# Altium PCB CH32X035G8U-R0-1v2.PcbDoc
Units mil, origin at the board's own origin, x right, y up, seen from the top; angles counter-clockwise.
Board outline 1889.76 x 1771.65 mil, 2 copper layers (Top Layer, Bottom Layer); 29 components, 41 nets, 148 pads, 339 vias.
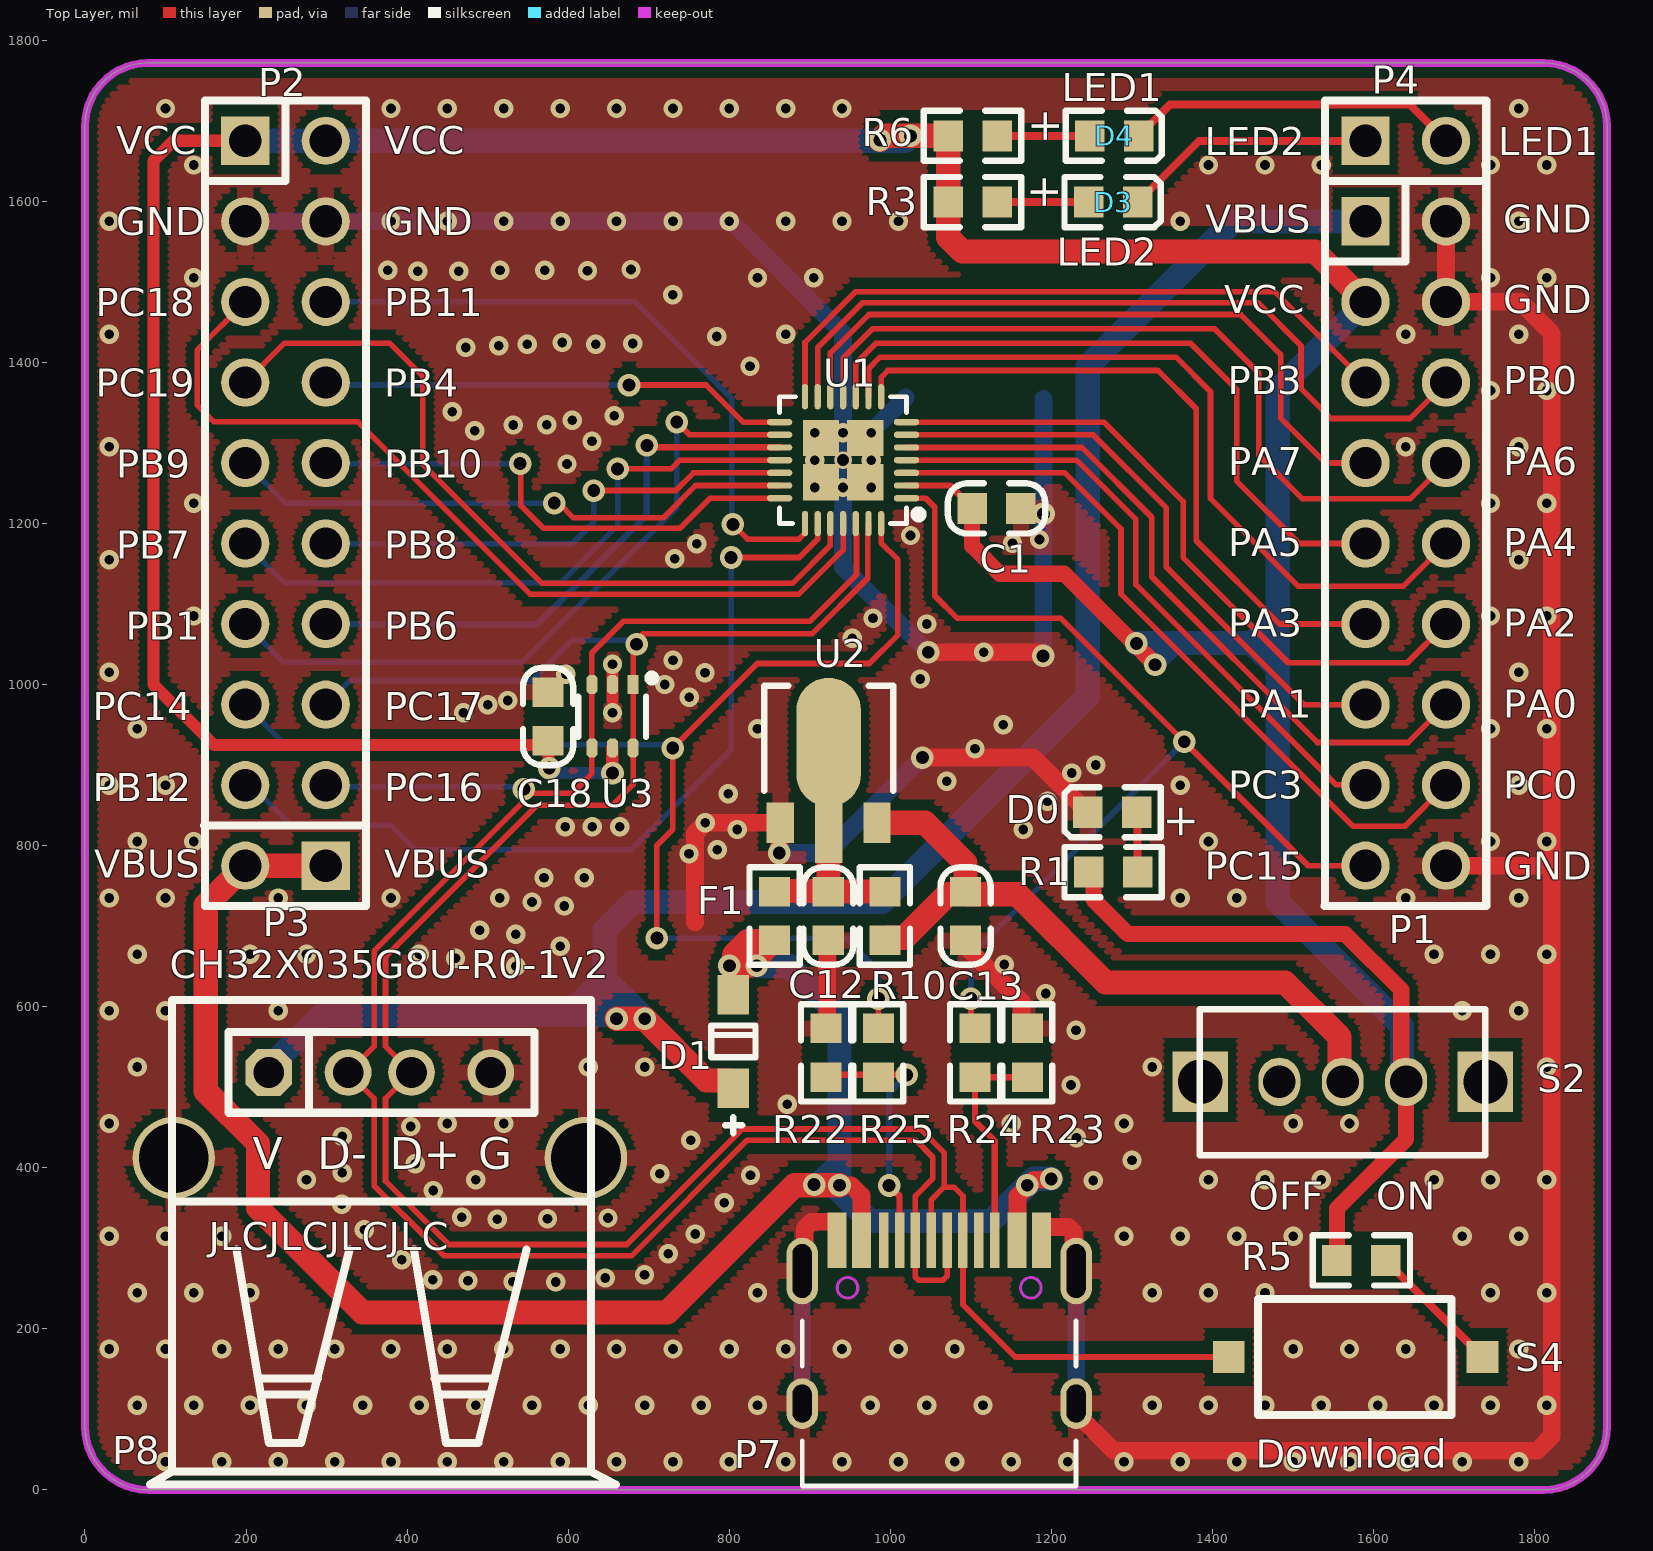
[diagram p0: Top Layer view]
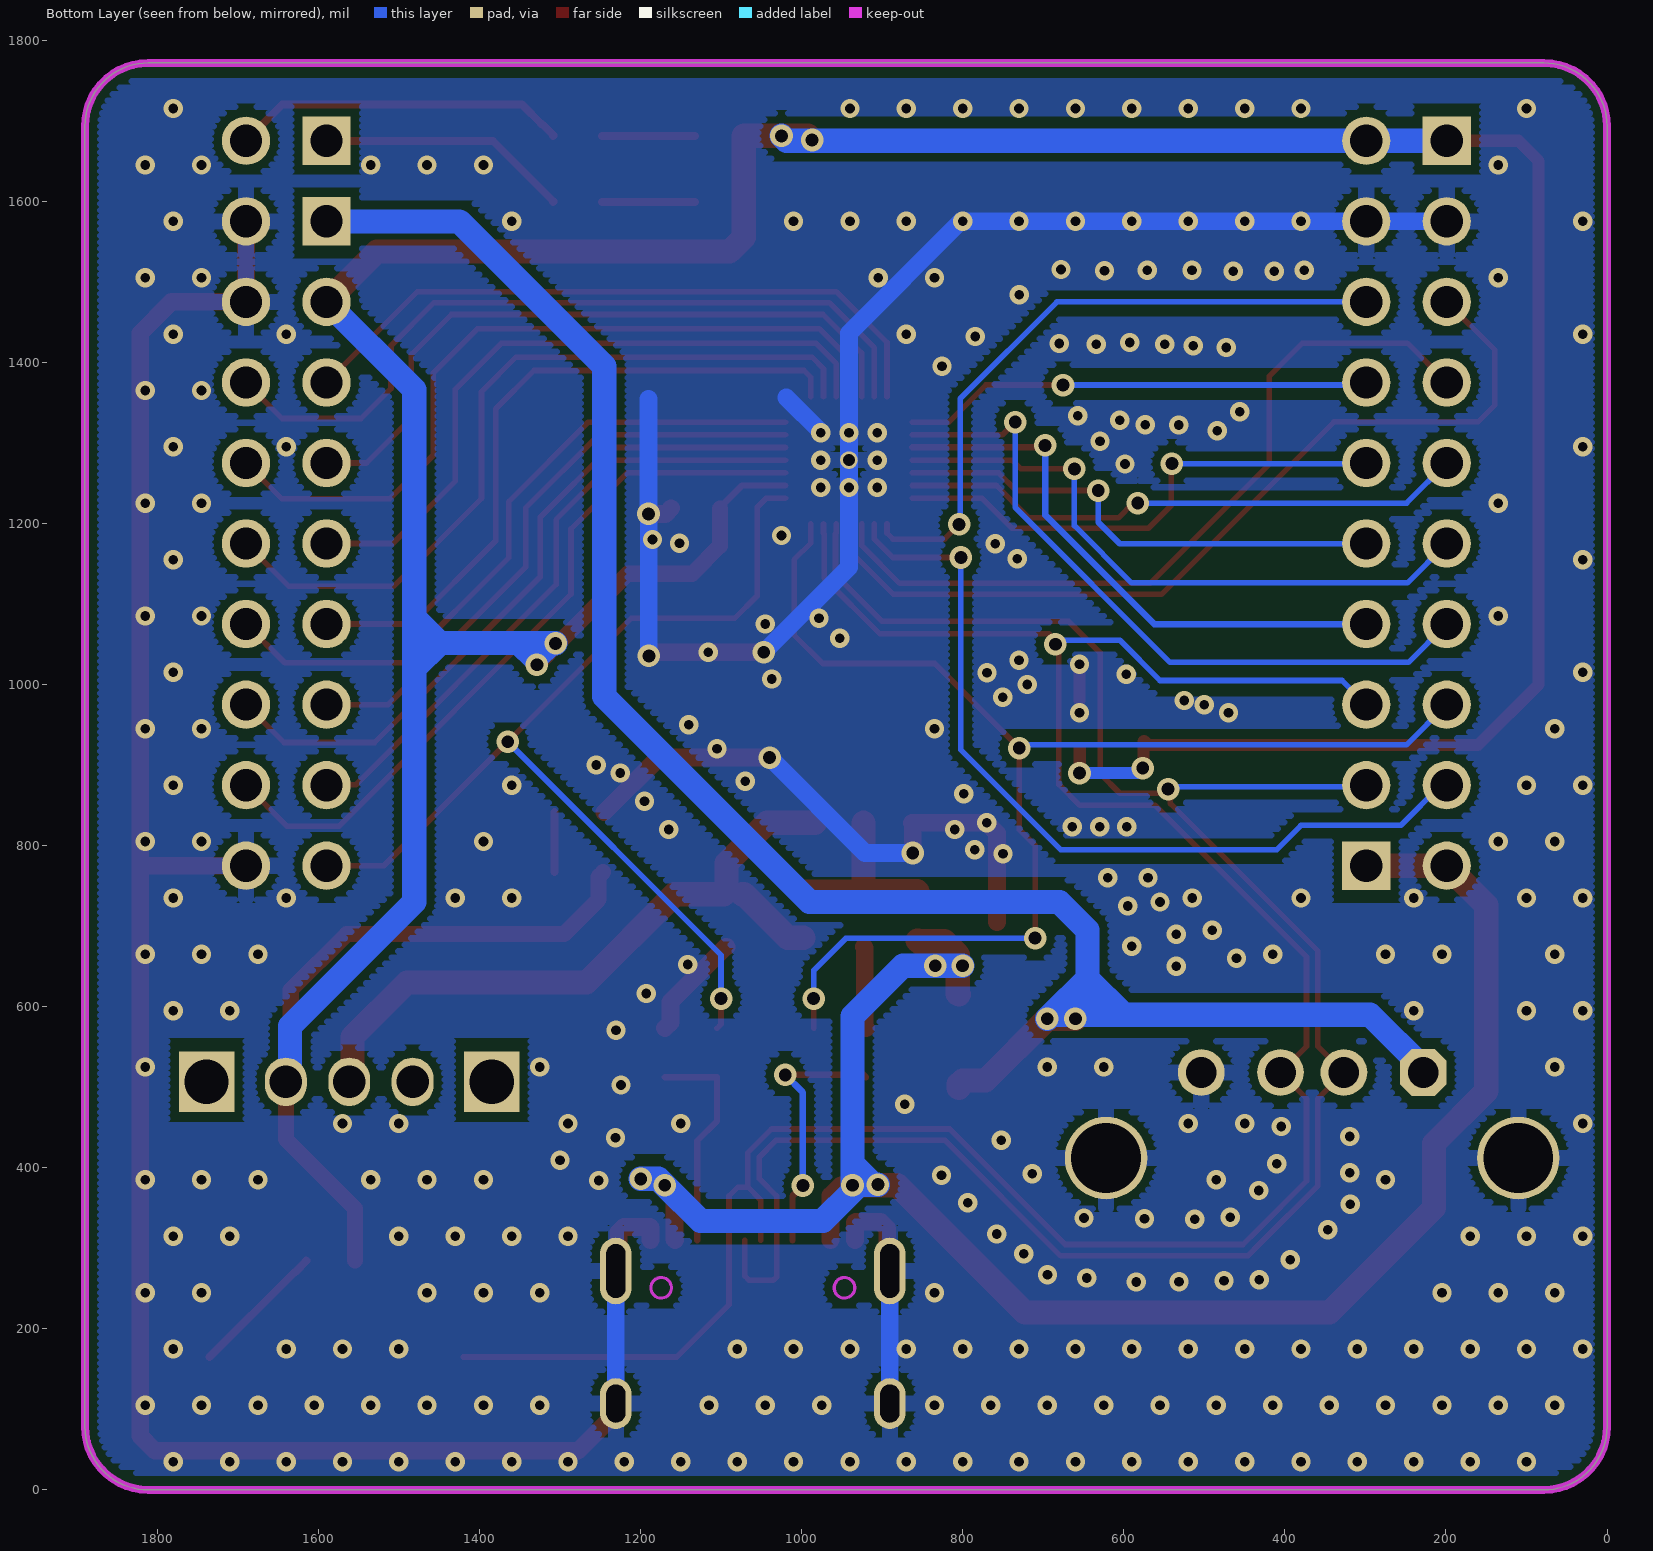
[diagram p1: Bottom Layer view, seen from below]

## Layer stack, top to bottom
Top Solder: solder mask 0.4, Solder Resist, Dk 3.5
Top Layer: signal copper 1.4
Dielectric1: dielectric 12.6, FR-4, Dk 4.8
Bottom Layer: signal copper 1.4
Bottom Solder: solder mask 0.4, Solder Resist, Dk 3.5

## Board outline
0,78.74 0,1692.91 cw(c78.74,1692.91) 78.74,1771.65 1811.02,1771.65 cw(c1811.02,1692.91) 1889.76,1692.91 1889.76,78.74 cw(c1811.02,78.74) 1811.02,0 78.74,0 cw(c78.74,78.74)

## Design rules (kind name [scope] priority, off if disabled: settings)
Clearance Clearance_1 [InPolygon] p1: gap=10 ignorepadtopadclearanceinfootprint=FALSE except(0: Arc-Hole Track-Hole SMDPad-Hole THPad-Hole Via-Hole Fill-Hole Poly-Hole Region-Hole Text-Hole)
Clearance [All] p2: gap=6 ignorepadtopadclearanceinfootprint=FALSE except(0: Arc-Hole Track-Hole SMDPad-Hole THPad-Hole Via-Hole Fill-Hole Poly-Hole Region-Hole Text-Hole)
ComponentClearance [All] p1 off: gap=10 collisioncheckmode=3 verticalgap=10 showdistances=FALSE
DiffPairsRouting [All] p1: maxlimit=10 minlimit=7 mostfreqgap=8 toplayer_minwidth=15 toplayer_maxwidth=15 toplayer_prefwidth=15 bottomlayer_minwidth=15 bottomlayer_maxwidth=15 bottomlayer_prefwidth=15 maxuncoupledlength=500
MinimumSolderMaskSliver [All] p1 off: minsoldermaskwidth=10
PolygonConnect PolygonConnect_1 [IsVia] p1: connectstyle=Direct reliefconductorwidth=10 reliefentries=4 polygonreliefangle="90 Angle" airgapwidth=10
PolygonConnect [All] p2: connectstyle=Relief reliefconductorwidth=20 reliefentries=4 polygonreliefangle="90 Angle" airgapwidth=10
RoutingVias [All] p1: holewidth=16 width=28 viastyle="Through Hole" minholewidth=12 minwidth=24 maxholewidth=28 maxwidth=50
SilkToSilkClearance [All] p1 off: silktosilkclearance=10
SilkToSolderMaskClearance [IsPad] p1 off: minsilkscreentomaskgap=10 clearancetoexposedcopper=TRUE
SolderMaskExpansion [All] p1: expansion=2 istentingtop=FALSE
Width [All] p1: maxlimit=100 minlimit=6 preferedwidth=10
25 further rules are at their usual default settings.

## Components (designator, comment, footprint, x,y, rotation, side; value= is the part's Value field where it differs from the comment)
C1 "0.1uF" 0603_C 1162.03,1218.63 r180 top
C12 "10uF" 0603_C 922.89,742.87 r270 top
C13 "10uF" 0603_C 1093.31,742.87 r270 top
C18 "0.1uF" 0603_C 575,990.63 r270 top
D0 "POWER  red" 0603+ 1305.61,841.34 r180 top
D1 "Diode" SOD-123 805,498.86 r90 top
D3 "LED2" 0603+ 1246.36,1598.95 r0 top
D4 "LED1" 0603+ 1247.7,1681.18 r0 top
F1 "500mA" 0603 856.22,682.24 r90 top
P1 "Header 9X2" IDC18-2.54mm 1589.76,1575 r0 top
P2 "Header 9X2" IDC18-2.54mm 199,1675 r0 top
P3 "HEADER 2" SIP2-2.54mm 299,775 r90 top
P4 "Header 2" SIP2-2.54mm 1589.76,1675 r270 top
P7 "TYPE-C" TYPE-C-Receptacle-2.0 1060.55,310 r0 top
P8 "USB_A" USBAF 228.29,518.31 r0 top
R1 "1K" 0603 1306.99,767.04 r180 top
R3 "1K" 0603 1071.74,1598.95 r0 top
R5 "4.7K" 0603 1554.37,285 r0 top
R6 "1K" 0603 1071.74,1681.18 r0 top
R10 "NC(0Ω)" 0603 993.16,682.24 r90 top value=10K
R22 "5.1K" 0603 920.04,512.42 r90 top
R23 "5.1K" 0603 1170.04,512.42 r90 top
R24 "0Ω" 0603 1105.04,573.05 r270 top
R25 "0Ω" 0603 985.04,512.42 r90 top
S2 "SW" SW1 1561.64,506.67 r0 top
S4 "Download" SMD_6.1x3.65x2.5mm-KEY 1735,165 r180 top
U1 "CH32X035G8U6" QFN28_4X4 941.26,1278.5 r90 top
U2 "HT7533" SOT-89 863.34,828.28 r0 top
U3 "CH412K" SOT-363 680.59,1000 r180 top

## Footprints (in the part's own frame and the unit in brackets; to place one, negate y for a bottom-side part, rotate by r counter-clockwise, add the part's x,y. Pads: shape width x height; smd on the part's side, far side on the other; paste and mask are expansions set on the pad)
0603 [mm]
  rect 0.93x0.98 smd: 1(0,0) 2(1.54,0)
  silkscreen extent -0.76,-0.79 2.3,0.79
0603+ [mm]
  rect 0.93x0.98 smd: 1(0,0) 2(1.54,0)
  silkscreen extent -0.76,-0.79 2.27,0.79
0603_C [mm]
  rect 0.93x0.98 smd mask+0.051: 1(0,0) 2(1.54,0)
  silkscreen extent -0.76,-0.79 2.31,0.79
IDC18-2.54mm [mil]
  rect 60x60 hole 40: 1(0,0)
  round 60 hole 40: 2(100,0) 3(0,-100) 4(100,-100) 5(0,-200) 6(100,-200) 7(0,-300) 8(100,-300) 9(0,-400) 10(100,-400) 11(0,-500) 12(100,-500) 13(0,-600) 14(100,-600) 15(0,-700) 16(100,-700) 17(0,-800) 18(100,-800)
  silkscreen extent -51,-850 150,50
QFN28_4X4 [mm]
  rect 1.143x1.143 smd mask+0: 0(-0.699,-0.699) 0(-0.699,0.698) 0(0.699,-0.699) 0(0.699,0.698)
  round 0.559 hole 0.381 mask+0.051: 0(0,0)
  oval 0.2x0.8 smd mask+0.051: 1(-1.2,-2) 2(-0.8,-2) 3(-0.4,-2) 4(0,-2) 5(0.4,-2) 6(0.8,-2) 7(1.2,-2) 15(1.2,2) 16(0.8,2) 17(0.4,2) 18(0,2) 19(-0.4,2) 20(-0.8,2) 21(-1.2,2)
  oval 0.8x0.2 smd mask+0.051: 8(2,-1.2) 9(2,-0.8) 10(2,-0.4) 11(2,0) 12(2,0.4) 13(2,0.8) 14(2,1.2) 22(-2,1.2) 23(-2,0.8) 24(-2,0.4) 25(-2,0) 26(-2,-0.4) 27(-2,-0.8) 28(-2,-1.2)
  silkscreen extent -2,-2.51 2,2
SIP2-2.54mm [mil]
  rect 60x60 hole 40: 1(0,0)
  round 60 hole 40: 2(0,100)
  silkscreen extent -50,-50 50,150
SMD_6.1x3.65x2.5mm-KEY [mm]
  rect 1x1 smd: 1(0,0) 2(8,0)
  silkscreen extent 0.98,-1.83 7.08,1.83
SOD-123 [mm]
  rect 1.25x1 smd: 1(0,0) 2(2.95,0)
  silkscreen extent -1.43,-0.7 1.97,0.7
SOT-89 [mil]
  rect 34x50 smd: 1(0,0) 3(120,0)
  rect 34x100 smd: 2(60,0)
  oval 80x160 smd: ""(60,100)
  silkscreen extent -20,40 140,170
SOT-363 [mm]
  rect 0.35x0.6 smd mask+0.051: 1(0,0)
  oct 0.35x0.6 smd mask+0.051: 2(0.65,0) 3(1.3,0) 4(1.3,2) 5(0.65,2) 6(0,2)
  silkscreen extent -0.7,-0.31 1.73,1.65
SW1 [mm]
  rect 1.75x1.9 hole 1.4: 0(-4.5,0) 0(4.5,0)
  oval 1.321x1.524 hole 1.016: 1(0,0) 2(-2,0) 3(2,0)
  silkscreen extent -4.51,-2.31 4.5,2.29
TYPE-C-Receptacle-2.0 [mm]
  oval 1x1.6 hole 0.6 slot 1.2 at 90 deg: 0(-4.32,-5.15) 0(4.32,-5.15)
  oval 1x2.1 hole 0.6 slot 1.7 at 90 deg: 0(-4.32,-0.97) 0(4.32,-0.97)
  rect 0.6x1.75 smd mask+0.051: A1(-3.225,0) A4(-2.45,0) B1(3.225,0) B4(2.45,0)
  rect 0.3x1.75 smd mask+0.051: A5(-1.25,0) A6(-0.25,0) A7(0.25,0) A8(1.25,0) B5(1.75,0) B6(0.75,0) B7(-0.75,0) B8(-1.75,0)
  Keep-Out Layer circle w0.1: c2.89,-1.5 r0.325
  Keep-Out Layer circle w0.1: c-2.89,-1.5 r0.325
  silkscreen extent -4.32,-7.75 4.32,-2.55
USBAF [mm]
  round 2.6 hole 2.2: 0(-3,-2.7) 0(10,-2.7)
  oct 1.473x1.473 hole 0.965: 1(0,0)
  round 1.473 hole 0.965: 2(2.5,0) 3(4.5,0) 4(7,0)
  silkscreen extent -3.75,-12.99 10.95,2.29

## Part data
C1 C18: library part Cap, "Capacitor"
C12 C13: library part CAP, "Capacitor"
D0 D3 D4: library part LED0, "Typical INFRARED GaAs LED", LatestRevisionDate=08-Jul-2005, LatestRevisionNote="Mech Layer 1 removed.", PackageReference=LED-0, Published=8-Jun-2000, Publisher="Altium Limited"
D1: "Default Diode", Code_JEDEC=DO-214-AB, LatestRevisionDate=17-Jul-2002, LatestRevisionNote="Re-released for DXP Platform.", PackageReference=SMC, PackageVersion=Sep-1996, Published=8-Jun-2000, Publisher="Altium Limited"
F1: library part FUSE1, "Fuse"
P1 P2: "Header, 9-Pin, Dual row", LatestRevisionDate=17-Jul-2002, LatestRevisionNote="Re-released for DXP Platform.", Publisher="Altium Limited"
P3: "Header, 2-Pin"
P4: library part "HEADER 2", "Header, 2-Pin"
P7: library part TYPE-C1
P8: library part USB, "USB Port"
R1 R3 R6: library part "Res Semi", "Semiconductor Resistor", LatestRevisionDate=17-Jul-2002, LatestRevisionNote="Re-released for DXP Platform.", PackageReference=AXIAL-0.5, Published=8-Jun-2000, Publisher="Altium Limited"
R5 R10 R22 R23 R24 R25: library part Res2, "Resistor"
  R10: LatestRevisionDate=17-Jul-2002, LatestRevisionNote="Re-released for DXP Platform.", PackageReference=AXIAL-0.4, Published=8-Jun-2000, Publisher="Altium Limited"
S4: library part KEY1
U1: "RISC-V MCU with USB/PD/ADC/SPI/I2C/UART/OA/CMP"
U2: library part 1117-3.3V
U3: "Qaud ESD protect, high speed"

## Via types
v1: diameter 24, hole 12, Top Layer to Bottom Layer, tented both sides, 302 vias
v2: diameter 28, hole 16, Top Layer to Bottom Layer, tented both sides, 37 vias

## Nets (pads, with @x,y where several pads share a name; then routed paths per layer and width w, separated by ;. In a path a pad name is that pad's centre, name@x,y a point inside that pad or via, vN(x,y) a via of type N, cw(c..) or ccw(c..) an arc to the next point about the centre after c; other vN are vias at no path point)
5V: C12.1 F1.2 R10.2 U2. U2.2 | length 223.3
  Top Layer w30: F1.2 856.88,743.54 922.22,743.54 C12.1 ; U2.2 923.11,828.05 C12.1@923.11,743.1 ; R10.2 992.94,743.1 C12.1@923.11,743.1 ; C12.1 C12.1@923.11,743.1 ; C12.1 C12.1@923.11,743.1
CC1: P2.15 R25.2 U1.28 | length 1645.4
  Top Layer w7: v2(710,685) 710,800 729.76,819.76 v2(729.76,921.03) 834.74,1026.01 973.8,1026.01 1009.29,1061.51 1009.29,1155.05 988.5,1175.84 U1.28 ; v2(985,610) 985,573.09 R25.2
  Bottom Layer w7: P2.15 249,925 725.78,925 v2(729.76,921.03) ; v2(710,685) 945,685 985,645 v2(985,610)
CC2: P1.17 R24.1 U1.1 | length 1290.8
  Top Layer w7: U1.1 1043.83,1231.26 1055.13,1219.96 1055.13,1110.09 1083.1,1082.12 1211.64,1082.12 1518.76,775 P1.17 ; v2(1100,610) 1100,578.09 R24.1
  Bottom Layer w7: v2(1100,610) 1100,664.02 v2(1364.87,928.89)
GND: C1.1 C12.2 C13.2 C18.1 D0.2 P1.2 P1.4 P1.18 P2.3 P2.4 P7.0 P7.A1 P7.B1 P8.0 P8.4 R22.2 R23.2 U1.0 U2.1 U3.2 | length 5731.2
  Top Layer w15: 655,980 U3.2 v1(655,1025)
  Top Layer w22: 757.33,705 757.33,815.39 v1(770.22,828.28) U2.1 861.97,826.9 v2(861.97,790.78) ; P7.0@890.47,271.81 893.8,275.13 893.8,324.53 902.05,332.79 932.77,332.79 933.58,331.98 P7.A1 ; R22.2 921.46,574.47 921.46,672.95 C12.2@922.89,674.37 ; v2(1039.74,909.28) 1177.05,909.28 D0.2 ; v2(1046.95,1039.97) v1(1116.05,1039.97) 1185.16,1039.97 v2(1189.63,1035.5) ; C13.2@1093.31,674.37 1094.3,674.37 1162.69,605.97 1162.69,580.35 R23.2 ; C1.1 1168.91,1211.75 v2(1190.09,1211.75) ; P7.B1 1187.52,325.74 1188.33,326.55 1220.56,326.55 1227.31,319.8 1227.31,275.13 P7.0@1230.63,271.81 ; P7.0@1230.63,107.24 1236.3,101.57 1236.3,89.76 1277.32,48.74 1803.08,48.74 1821.23,66.9 1821.23,774.8 ; P1.18 1689.96,774.8 1821.23,774.8 ; P1.2 P1.4 1782.39,1475 1821.23,1436.15 1821.23,774.8
  Bottom Layer w22: P2.3 P2.4 802.45,1575 941.26,1436.19 v1(941.26,1312.5) 941.26,1278.5 v1(941.26,1244.5) 941.26,1145.66 v2(1046.95,1039.97) ; v2(861.97,790.78) 921.24,790.78 v2(1039.74,909.28) ; P7.0@890.47,107.24 P7.0@890.47,271.81 ; v1@975.76,1313 1019.01,1356.26 ; v2(1189.63,1035.5) 1189.63,1211.29 v2(1190.09,1211.75) 1190.09,1354.52 ; P7.0@1230.63,107.24 P7.0@1230.63,271.81
  other v1: 100,35 170,35 240,35 310,35 380,35 450,35 520,35 590,35 660,35 730,35 800,35 870,35 940,35 1010,35 1080,35 1150,35 1220,35 1290,35 1360,35 1430,35 1500,35 1570,35 1640,35 1710,35 1780,35 65,105 135,105 205,105 275,105 345,105 415,105 485,105 555,105 625,105 695,105 765,105 835,105 975,105 1045,105 1115,105 1325,105 1395,105 1465,105 1535,105 1605,105 1675,105 1745,105 1815,105 30,175 100,175 170,175 240,175 310,175 380,175 450,175 520,175 590,175 660,175 730,175 800,175 870,175 940,175 1010,175 1080,175 1500,175 1570,175 1640,175 1780,175 65,245 135,245 205,245 835,245 1325,245 1395,245 1465,245 1745,245 1815,245 584.51,258.15 531.43,258.6 475.65,259.5 432.02,260.85 646.13,263.1 694.77,267.06 393.23,285.9 724.31,293.16 30,315 100,315 170,315 1290,315 1360,315 1430,315 1500,315 1710,315 1780,315 757.79,317.77 346.58,323.12 511.84,336.02 574.38,336.52 649.31,337.51 467.68,338.5 318.79,354.88 793.73,356.67 432.44,371.75 1251.74,384.23 275,385 485,385 1395,385 1465,385 1535,385 1675,385 1745,385 1815,385 826.22,390.64 713.83,392.6 319.29,393.59 410.11,405 1299.9,409.22 752.04,434.28 1230.98,437.37 319.29,438.75 404.65,451.16 30,455 450,455 520,455 1150,455 1290,455 1500,455 1570,455 871.93,478.76 1224.26,502.72 65,525 625,525 695,525 1325,525 1815,525 1230.36,570.52 30,595 100,595 240,595 1710,595 1780,595 1193.06,616.24 535,650 1141.21,652.36 460,660 65,665 205,665 275,665 415,665 1675,665 1745,665 1815,665 590,675 535,690 490,695 595,725 555,730 30,735 100,735 240,735 380,735 515,735 1360,735 1430,735 1640,735 1780,735 570,760 620,760 750,790 785,795 65,805 135,805 1395,805 1745,805 1815,805 810,820 1165,820 596.17,823.5 630,823.5 663.83,823.5 1195,855 798.76,864.31 30,875 100,875 1360,875 1780,875 1070,880 1225,890 1255,900 1105,920 65,945 835,945 1745,945 1815,945 1140,950 470,965 655,965 500,975 525,980 750.25,984.25 720,1000 1037.07,1006.74 597.08,1012.57 769.74,1014.45 30,1015 1780,1015 730,1030 952.84,1057.39 1045,1075 978.34,1082.33 135,1085 1745,1085 1815,1085 30,1155 1780,1155 732.46,1156.17 759.42,1174.79 1151.61,1175.25 1185.13,1179.9 1025,1185 135,1225 1745,1225 1815,1225 906.26,1244.5 976.26,1244.5 598.58,1273.75 906.26,1278.5 976.26,1278.5 30,1295 1640,1295 1780,1295 629.54,1301.8 906.26,1312.5 976.26,1312.5 483.94,1314.86 531.83,1322.12 573.42,1322.6 604.87,1327.92 657.11,1333.73 455.88,1338.56 1745,1365 1815,1365 825.72,1395.11 472.76,1418.29 513.84,1420.42 549.25,1422.54 634.23,1422.54 680.27,1423.25 592.45,1424.67 784.52,1432.05 30,1435 870,1435 1640,1435 1780,1435 729.82,1483.9 135,1505 835,1505 905,1505 1745,1505 1815,1505 413.01,1513.03 464.16,1513.03 376.08,1514.45 515.3,1514.45 570.71,1514.45 623.98,1513.74 677.97,1515.16 30,1575 380,1575 450,1575 520,1575 590,1575 660,1575 730,1575 800,1575 870,1575 940,1575 1010,1575 1360,1575 1780,1575 135,1645 1395,1645 1465,1645 1535,1645 1745,1645 1815,1645 100,1715 380,1715 450,1715 520,1715 590,1715 660,1715 730,1715 800,1715 870,1715 940,1715 1780,1715
LED1: D4.2 P4.2 | length 416.7
  Top Layer w10: D4.2 1308.33,1682.16 1321.64,1695.47 1322.62,1695.47 1347.15,1719.99 1644.77,1719.99 P4.2
LED2: D3.2 P4.1 | length 313.5
  Top Layer w10: D3.2@1308.33,1598.95 1308.33,1599.93 1383.4,1675 P4.1
NetC13_1: C13.1 R10.1 S2.1 U2.3 | length 860.9
  Top Layer w30: U2.3 1043.04,828.28 1093.31,778 C13.1 1096.62,739.57 1157.6,739.57 1267.17,630 1490,630 1557.78,562.22 1557.78,510.53 S2.1 ; R10.1@997.45,685.55 1017.31,685.55 1071.32,739.57 1073.62,739.57
NetD0_1: D0.1 R1.1 | length 74.3
  Top Layer w10: R1.1 D0.1@1306.99,841.34
NetD3_1: D3.1 R3.2 | length 115.3
  Top Layer w10: R3.2 D3.1@1247.7,1598.95
NetD4_1: D4.1 R6.2 | length 115.3
  Top Layer w10: R6.2 D4.1
NetP7_A5: P7.A5 R22.1 R25.1 | length 321.2
  Top Layer w8: R22.1 922.92,515.3 v2(1020.25,515.3) ; v2(998.33,377.93) 1011.34,364.92 P7.A5
  Bottom Layer w8: v2(998.33,377.93) 998.33,493.37 v2(1020.25,515.3)
NetP7_B5: P7.B5 R23.1 R24.2 | length 277.5
  Top Layer w8: P7.B5 1129.45,433.41 1105.04,457.82 R24.2 R23.1
NetR5_2: R5.2 S4.1 | length 170.3
  Top Layer w10: R5.2 1615,284.02 1628.31,270.71 1629.29,270.71 S4.1
PA0: P1.14 U1.5 | length 884.3
  Top Layer w7: U1.5 1237.79,1294.25 1324.41,1207.63 1324.41,1133.68 1530.11,927.99 1642.75,927.99 P1.14
PA1: P1.13 U1.6 | length 751.5
  Top Layer w7: U1.6 1251.63,1310 1342.65,1218.97 1342.65,1145.61 1513.26,975 P1.13
PA2: P1.12 U1.7 | length 854.4
  Top Layer w7: U1.7 1264.9,1325.75 1363.42,1227.22 1363.42,1157.45 1493.98,1026.89 1641.66,1026.89 P1.12
PA3: P1.11 U1.8 | length 855.2
  Top Layer w7: U1.8 988.5,1381.32 996.94,1389.76 1332.27,1389.76 1379.74,1342.3 1379.74,1178.45 1483.18,1075 P1.11
PA4: P1.10 U1.9 | length 975.3
  Top Layer w7: U1.9 972.75,1392.05 987.13,1406.43 1354.45,1406.43 1397.49,1363.39 1397.49,1230.93 1506.62,1121.8 1636.57,1121.8 P1.10
PA5: P1.9 U1.10 | length 853.9
  Top Layer w7: U1.10 957,1398.58 981.88,1423.45 1372.96,1423.45 1429.89,1366.52 1429.89,1252.77 1507.66,1175 P1.9
PA6: P1.8 U1.11 | length 977.1
  Top Layer w7: U1.11 941.26,1405.1 977.87,1441.71 1402.5,1441.71 1457.39,1386.82 1457.39,1284.54 1511.15,1230.78 1645.54,1230.78 P1.8
PA7: P1.7 U1.12 | length 861
  Top Layer w7: U1.12 925.51,1411.62 973.23,1459.35 1434.77,1459.35 1484.5,1409.62 1484.5,1330.69 1540.2,1275 P1.7
PB0: P1.6 U1.13 | length 973.5
  Top Layer w7: U1.13 909.76,1418.14 965.73,1474.11 1456.25,1474.11 1509.78,1420.59 1509.78,1367.41 1547.04,1330.15 1644.91,1330.15 P1.6
PB1: P2.13 U1.16 | length 875.4
  Top Layer w7: v2(734.82,1325.76) 750.58,1310 U1.16
  Bottom Layer w7: P2.13 246.55,1027.45 542.45,1027.45 734.82,1219.82 v2(734.82,1325.76)
PB3: P1.5 U1.14 | length 836
  Top Layer w7: U1.14 894.01,1424.67 957.03,1487.68 1477.08,1487.68 P1.5
PB4: P2.8 U1.15 | length 586.1
  Top Layer w7: v2(675.49,1371.73) 771.19,1371.73 817.17,1325.75 U1.15
  Bottom Layer w7: P2.8 301.67,1377.67 307.6,1371.73 v2(675.49,1371.73)
PB6: P2.14 U1.17 | length 715
  Top Layer w8: P2.14 P2.14@304.68,1080.68 ; v2(697.65,1296.74) 700.15,1294.25 U1.17
  Bottom Layer w8: P2.14 562.29,1075 697.65,1210.37 v2(697.65,1296.74)
PB7: P2.11 U1.18 | length 788.2
  Top Layer w7: v2(661.42,1267.72) 727.8,1267.72 738.59,1278.5 U1.18
  Bottom Layer w7: P2.11 247.85,1126.15 590.41,1126.15 661.42,1197.16 v2(661.42,1267.72)
PB8: P2.12 U1.19 | length 623.1
  Top Layer w7: v2(631.73,1240.75) 733.45,1240.75 755.46,1262.76 U1.19
  Bottom Layer w7: P2.12 299.33,1174.67 604.94,1174.67 631.73,1201.46 v2(631.73,1240.75)
PB9: P2.9 U1.20 | length 708.3
  Top Layer w7: v2(582.67,1225.1) 588.35,1225.1 606.56,1206.89 717.98,1206.89 758.1,1247.01 U1.20
  Bottom Layer w7: P2.9 248.9,1225.1 v2(582.67,1225.1)
PB10: P2.10 U1.21 | length 642.5
  Top Layer w7: v2(540.31,1274.15) 540.9,1273.56 540.9,1222.45 569.46,1193.89 738.83,1193.89 776.2,1231.26 U1.21
  Bottom Layer w7: P2.10 299.85,1274.15 v2(540.31,1274.15)
PB11: P2.6 U1.22 | length 822.5
  Top Layer w7: v2(804.35,1198.79) 822.63,1180.52 886.57,1180.52 894.01,1187.95 U1.22
  Bottom Layer w7: P2.6 682.91,1475 803.09,1354.82 803.09,1200.05 v2(804.35,1198.79)
PB12: P2.17 U1.23 | length 1062.7
  Top Layer w7: v2(802.26,1157.61) 886.9,1157.61 909.59,1180.31 909.59,1199.6 U1.23
  Bottom Layer w7: P2.17 206.17,875 256.17,825 380,825 410,795 678.44,795 802.26,918.81 v2(802.26,1157.61)
PC0: P1.16 U1.3 | length 919.9
  Top Layer w7: U1.3 1216.58,1262.76 1286.35,1192.99 1286.35,1112.21 1574.55,824.01 1638.78,824.01 P1.16
PC3: P1.15 U1.4 | length 784.1
  Top Layer w7: U1.4 1230.91,1278.5 1304.8,1204.62 1304.8,1123.99 1553.36,875.43 1589.34,875.43 P1.15
PC16: P2.18 P7.A7 P7.B7 P8.2 U1.26 U3.3 U3.4 | length 2564.2
  Top Layer w7: v2(545,870) v2@545,865 ; U1.26 957,1187.72 957.88,1186.84 957.88,1136.26 900.12,1078.5 668.5,1078.5 629.41,1039.41 U3.3 U3.4 629.41,889.41 605,865 v2@545,865 ; P7.A7 1070.39,265.63 1065.08,260.32 1035.12,260.32 1031.02,264.42 P7.B7 1031.02,364.89 1052.65,386.51 1052.65,413.02 1031.57,434.1 821.92,434.1 678.45,290.63 446.12,290.63 429.9,306.84 359.09,377.66 359.09,485.94 P8.2 359.09,550.68 359.09,669.09 542.18,852.18 542.18,862.18 v2@545,865
  Bottom Layer w7: P2.18 300.88,873.12 541.88,873.12 v2(545,870)
PC17: P2.16 P7.A6 P7.B6 P8.3 S4.2 U1.27 U3.1 U3.6 | length 3121.6
  Top Layer w7: U1.27 972.75,1187.72 971.88,1186.84 971.88,1131.88 902.77,1062.77 692.77,1062.77 680.59,1050.59 U3.1 U3.6 680.59,875.59 655,850 561.19,850 373.09,661.89 373.09,550.68 P8.3 373.09,485.94 373.09,383.46 434.85,321.69 451.92,304.63 672.65,304.63 816.13,448.1 1037.37,448.1 1066.65,418.82 1066.65,375.93 ; P7.A6 1050.71,359.99 1066.65,375.93 ; S4.2 1155,165 1090.08,229.92 P7.B6 1090.08,364.89 1079.03,375.93 1066.65,375.93
  Bottom Layer w7: P2.16 329,1005 555,1005 605,1055 v2@685,1055
  other v2: 685,1050
PC18: P2.5 U1.25 | length 1107.8
  Top Layer w7: P2.5 139.33,1415.33 139.33,1346.79 160.12,1326 339,1326 553.16,1111.84 886.12,1111.84 941.26,1166.97 U1.25
PC19: P2.7 U1.24 | length 981
  Top Layer w7: P2.7 247.86,1423.86 378.24,1423.86 419.21,1382.89 419.21,1273.63 567.28,1125.56 878.48,1125.56 925.34,1172.41 925.34,1199.6 U1.24
VBUS: D1.1 P1.1 P8.1 | length 2497.6
  Top Layer w30: v2(660,585) v2(695,585) 771.54,508.46 800.31,508.46 805,503.78 D1.1
  Bottom Layer w30: P8.1 228.29,524.02 294.27,590 600,590 ; v2(695,585) v2@690,590 ; P1.1 1425,1575 1245,1395 1245,985 990,730 680,730 645,695 645,635 ; 600,590 627.43,590 ; 600,590 645,635 ; 627.43,590 645,607.57 ; 627.43,590 v2@658.71,590 ; 645,607.57 645,635 ; 645,607.57 645,603.71 v2@658.71,590 ; 645,635 v2@690,590 ; v2@658.71,590 v2@690,590
VBUS1: D1.2 F1.1 P3.1 P3.2 P7.A4 P7.B4 | length 2529.8
  Top Layer w22: v2(936.84,378.29) 951.21,378.29 964.09,365.41 P7.A4 ; P7.B4 1157.82,310.81 1157.82,364.58 1169.91,376.67 v2(1169.91,378.29) 1171.53,378.29 1178.34,385.1 1198.51,385.1 v2(1199.66,386.25)
  Top Layer w30: P3.1 P3.2 150,726 150,495 215,430 215,350 344.64,220.36 723.04,220.36 880.97,378.29 v2(936.84,378.29) ; D1.2 806.07,616.07 v2@806.07,650.56 ; v2@806.07,650.56 806.07,664.33 822.83,681.1 F1.1@854.09,681.1 ; v2@806.07,650.56 823.55,650.56 F1.1@854.09,681.1 ; F1.1@854.09,681.1 855.08,681.1 F1.1 855.24,682.24 F1.1@854.09,681.1
  Bottom Layer w30: v2(800.16,650.81) v2(834.09,650.81) 874.19,650.81 936.84,588.16 936.84,405 ; v2(905.38,378.99) v2@910.83,378.99 ; v2(1199.66,386.25) 1177.86,386.25 v2(1169.91,378.29) 1125.66,334.05 973.62,334.05 v2@936.84,370.82 ; v2@910.83,378.99 936.84,405 ; v2@910.83,378.99 928.68,378.99 v2@936.84,370.82 ; v2@936.84,370.82 v2(936.84,378.29) 936.84,405
VCC: C1.2 C18.2 P1.3 P2.1 P2.2 R1.2 R3.1 R5.1 R6.1 S2.3 U1.2 U3.5 | length 5762.9
  Top Layer w8: U1.2 1074,1247.01 1101.4,1219.61 C1.2
  Top Layer w15: P2.1 110,1675 85,1650 85,1000 160,925 570,925 C18.2 575.74,929.26 575.74,896.85 v2(576.48,896.11) ; v2(655,890) 654.7,890.3 654.7,920.96 U3.5
  Top Layer w20: C1.2 1101.4,1172.08 1135.98,1137.49 1215.76,1137.49 v2@1302.27,1050.98 ; R1.2 1252.17,761.23 1252.17,732.83 1295,690 1565,690 1634.26,620.74 1634.26,500.74 S2.3@1635,500 ; R5.1 1554.37,349.37 1640.38,435.38 S2.3 ; v2@1302.27,1050.98 1324.8,1028.45 1324.8,1029.47 1305.46,1048.81 v2(1305.46,1050.98) v2@1302.27,1050.98
  Top Layer w30: v2(987.01,1676) 992.19,1681.18 v2(1024.95,1681.18) R6.1 R3.1 1071.74,1555.05 1089.31,1537.47 1527.29,1537.47 P1.3
  Bottom Layer w15: v2(576.48,896.11) 582.59,890 v2(655,890)
  Bottom Layer w20: v2(1305.46,1050.98) 1305.46,1049.39 1328.74,1026.11 v2(1328.74,1024.51) 1330.9,1024.51 1357.68,1051.29 1361.6,1051.29
  Bottom Layer w30: P2.1 P2.2 1018.77,1675 v2(1024.95,1681.18) ; v2(1305.46,1050.98) 1305.76,1051.29 1357.68,1051.29 ; 1361.6,1051.29 1449.27,1051.29 ; 1479.89,1051.29 1449.27,1051.29 ; 1480.86,1030 1480.86,1019.7 ; P1.3 1480.86,1366.09 1480.86,1082.88 ; S2.3@1635,510 1636.17,511.17 1636.17,520.83 1635,522 1635,575.86 1480.86,730 1480.86,1019.7 ; 1449.27,1051.29 1480.86,1082.88 ; 1449.27,1051.29 1480.86,1019.7 ; 1480.86,1019.7 1480.86,1082.88
pads on no net: P7.A8 P7.B8 S2.0 S2.2

## Polygon pours and split planes (outlines as drawn)
GND on Top Layer "GND" (hatched Horizontal grid 8 track 8, remove dead copper, pour order 0): 0,0 1889.76,0 1889.76,1771.65 0,1771.65
GND on Bottom Layer "GND" (hatched Horizontal grid 8 track 8, remove dead copper, pour order 1): 0,0 1889.76,0 1889.76,1771.65 0,1771.65

## Keep-outs
Keep-Out Layer:
  the board outline again, w10

## Silkscreen, mask and mechanical layers (free items; w line width, h text height)
Top Overlay:
  text "VCC" at 38.86,1658.1 h35
  text "VCC" at 371.74,1658.1 h35
  text "LED2" at 1390.1,1656.92 h35
  text "LED1" at 1754.65,1656.92 h35
  text "VBUS" at 1391.06,1561.12 h35
  text "GND" at 1760.6,1561.12 h35
  text "GND" at 38.86,1557.71 h35
  text "GND" at 371.74,1557.71 h35
  text "VCC" at 1414.44,1460.71 h35
  text "GND" at 1760.6,1460.71 h35
  text "PC18" at 13.64,1457.31 h35
  text "PB11" at 371.74,1457.31 h35
  text "PB3" at 1418.8,1360.3 h35
  text "PB0" at 1760.6,1360.3 h35
  text "PC19" at 13.64,1356.91 h35
  text "PB4" at 371.74,1356.91 h35
  text "PA7" at 1419.29,1259.9 h35
  text "PA6" at 1760.6,1259.9 h35
  text "PB9" at 38.86,1256.52 h35
  text "PB10" at 371.74,1256.52 h35
  text "PA5" at 1419.29,1159.49 h35
  text "PA4" at 1760.6,1159.49 h35
  text "PB7" at 38.86,1156.12 h35
  text "PB8" at 371.74,1156.12 h35
  text "PA3" at 1419.29,1059.08 h35
  text "PA2" at 1760.6,1059.08 h35
  text "PB1" at 50.52,1055.72 h35
  text "PB6" at 371.74,1055.72 h35
  text "PA1" at 1430.95,958.67 h35
  text "PA0" at 1760.6,958.67 h35
  text "PC14" at 9.7,955.33 h35
  text "PC17" at 371.74,955.33 h35
  text "PC3" at 1419.29,858.27 h35
  text "PC0" at 1760.6,858.27 h35
  text "PB12" at 9.7,854.93 h35
  text "PC16" at 371.74,854.93 h35
  text "VBUS" at 11.75,760.25 h35
  text "VBUS" at 371.74,760.25 h35
  text "PC15" at 1390.13,757.86 h35
  text "GND" at 1760.6,757.86 h35
  text "CH32X035G8U-R0-1v2" at 105,635 h35
  text "OFF" at 1444.73,347.9 h35
  text "ON" at 1603.14,347.9 h35
  text "JLCJLCJLCJLC" at 153.94,297.47 h35
Mechanical 1:
  the board outline again, w10

## Text inside footprints (layer, text, board x,y; h text height)
D0: Top Overlay "+" at 1343.69,852.33 h40 r270
D3: Top Overlay "+" at 1208.29,1587.96 h40 r90
D4: Top Overlay "+" at 1209.63,1670.19 h40 r90
P8: Top Overlay "D-" at 288.29,398.31 h40; Top Overlay "D+" at 378.29,398.31 h40; Top Overlay "V" at 208.29,398.31 h40; Top Overlay "G" at 488.29,398.31 h40